# Altium PCB PCB1.PcbDoc
Units mil, origin at the board's own origin, x right, y up, seen from the top; angles counter-clockwise.
Board outline 7884.05 x 541.63 mil, 2 copper layers (Top Layer, Bottom Layer); 13 components, 6 nets, 53 pads, 11 vias.
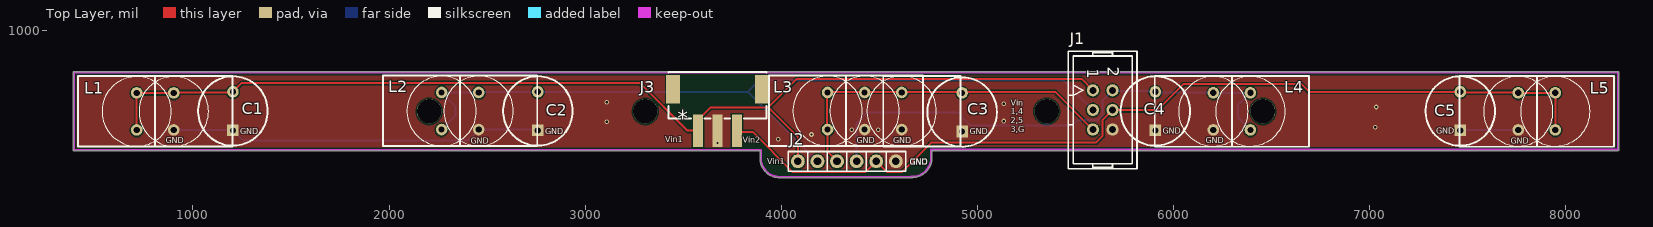
[diagram p0: Top Layer view]
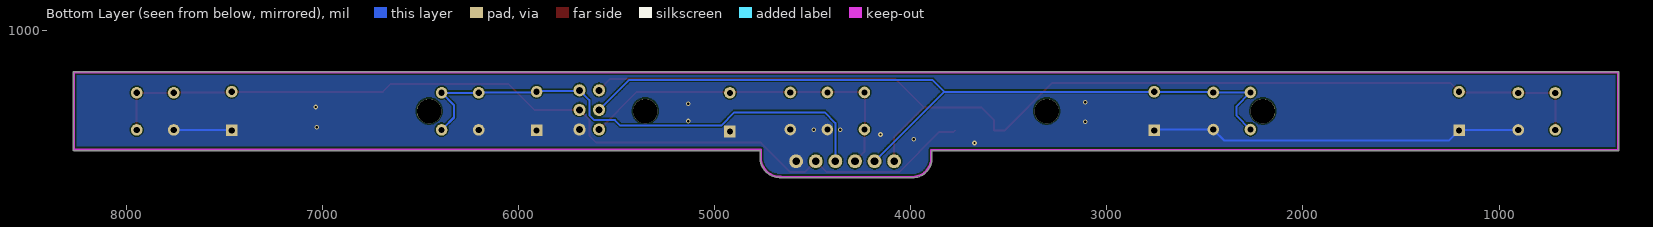
[diagram p1: Bottom Layer view, seen from below]
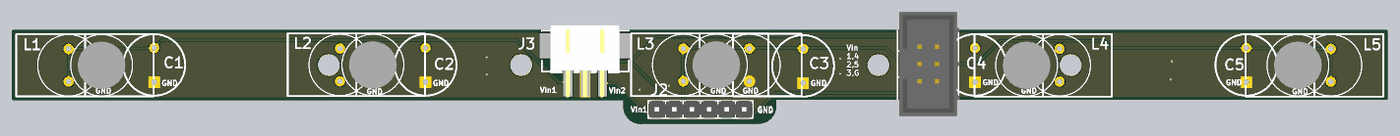
[diagram p2: 3D render of the assembled board from above, using the file's embedded part models]

## Layer stack, top to bottom
Top Solder: solder mask 0.4, Solder Resist, Dk 3.5
Top Layer: signal copper 1.4
Dielectric 1: dielectric 12.6, FR-4, Dk 4.8
Bottom Layer: signal copper 1.4
Bottom Solder: solder mask 0.4, Solder Resist, Dk 3.5

## Board outline
3892.62,358.46 ccw(c3992.48,350.84) 3998.96,250.91 ccw(c3998.64,255.91) 3999.3,250.94 ccw(c4000,255.91) 4000,250.89 4666.42,250.89 ccw(c4666.42,255.91) 4670.04,252.43 ccw(c4668.94,352.58) 4769.08,352.58 ccw(c4668.94,352.58) 4768.79,360.19 4768.79,389.99 8267.72,389.99 ccw(c8267.72,395) 8272.73,395 8272.73,787.4 ccw(c8267.72,787.4) 8267.72,792.42 393.7,792.42 ccw(c393.7,787.4) 388.69,787.4 388.69,393.7 ccw(c393.7,393.7) 393.7,388.69 3892.62,388.69

## Design rules (kind name [scope] priority, off if disabled: settings)
Clearance [All] p1: gap=6 ignorepadtopadclearanceinfootprint=TRUE except(0: Arc-Hole Track-Hole SMDPad-Hole THPad-Hole Via-Hole Fill-Hole Poly-Hole Region-Hole Text-Hole)
PolygonConnect [All] p1: connectstyle=Direct reliefconductorwidth=10 reliefentries=4 polygonreliefangle="90 Angle" airgapwidth=10
RoutingVias [All] p1: holewidth=28 width=50 viastyle="Through Hole" minholewidth=28 minwidth=50 maxholewidth=28 maxwidth=50
SolderMaskExpansion [All] p1: expansion=4
Width [All] p1: maxlimit=10 minlimit=10 preferedwidth=10
30 further rules are at their usual default settings.

## Components (designator, comment, footprint, x,y, rotation, side; value= is the part's Value field where it differs from the comment)
C1 "电容" 5mm 1200.79,590.55 r90 top value=22pF
C2 "电容" 5mm 2755.91,590.55 r90 top value=22pF
C3 "电容" 5mm 4920,585 r90 top value=22pF
C4 "电容" 5mm 5905.51,590.55 r90 top value=22pF
C5 "电容" 5mm 7460.63,590.55 r90 top value=22pF
J1 "PIN-6" 2.54简易牛角座6P 5590,696.97 r270 top
J2 "SIP-6" 2.54排针1X6 4385,335 r0 top
J3 "SIP-3" XH2.54-3SMD 3675,596.97 r0 top
L1 "直插电感" L8*10_4p_L 807.09,588.58 r90 top
L2 "直插电感" L8*10_4p_L 2362.2,590.55 r90 top
L3 "直插电感" L8*10_4p_C 4330.71,590.55 r90 top
L4 "直插电感" L8*10_4p_R 6299.21,590.55 r270 top
L5 "直插电感" L8*10_4p_R 7854.33,590.55 r270 top

## Footprints (in the part's own frame and the unit in brackets; to place one, negate y for a bottom-side part, rotate by r counter-clockwise, add the part's x,y. Pads: shape width x height; smd on the part's side, far side on the other; paste and mask are expansions set on the pad)
2.54排针1X6 [mm]
  round 1.8 hole 1: 1(-7.62,0) 2(-5.08,0) 3(-2.54,0) 4(0,0) 5(2.54,0) 6(5.08,0)
  silkscreen extent -8.89,-1.27 6.35,1.27, body extent -8.89,-1.27 6.35,1.27, height 2.5
2.54简易牛角座6P [mil]
  round 62 hole 35: 1(0,0) 2(0,100) 3(100,0) 4(100,100) 5(200,0) 6(200,100)
  silkscreen extent -200,-125 400,225, body extent -200,-117 400,231, height 359
5mm [mm] "插件"
  rect 1.5x1.5 hole 0.8: 1(-2.489,-0.076)
  round 1.5 hole 0.8: 2(2.515,-0.076)
  silkscreen extent -4.47,-4.58 4.52,4.42
L8*10_4p_C [mm]
  round 1.5 hole 0.8: 1(-2.377,-2.413) 1(-2.377,-7.213) 2(-2.377,2.387) 2(2.423,-2.413) 2(2.423,2.387) 2(2.423,-7.213)
  silkscreen extent -4.56,-14.83 4.61,10, body extent -3.48,-5.91 3.52,1.09, height 10.92
L8*10_4p_L [mm]
  round 1.5 hole 0.8: 1(-2.377,-2.413) 2(-2.377,2.387) 2(2.423,-2.413) 2(2.423,2.387)
  silkscreen extent -4.54,-10 4.61,10, body extent -3.48,-5.91 3.52,1.09, height 10.92
L8*10_4p_R [mm]
  round 1.5 hole 0.8: 1(2.423,-2.413) 2(-2.377,2.387) 2(-2.377,-2.413) 2(2.423,2.387)
  silkscreen extent -4.54,-10 4.61,10, body extent -3.48,-5.91 3.52,1.09, height 10.92
XH2.54-3SMD [mm] "CONN-SMD_3P-P2.54_XH2.54-3AB"
  rect 1.3x4.2 smd: 1(-2.54,-2.675) 2(0,-2.675) 3(2.54,-2.675)
  rect 1.801x3.7 smd: 4(-5.741,2.675) 5(5.741,2.675)
  silkscreen extent -6.35,-1.13 6.35,4.93, body extent -5.05,-4.87 4.95,5.63, height 5.85

## Part data
C1 C2 C3 C4 C5: "Capacitor", LatestRevisionDate=17-Jul-2002, LatestRevisionNote="Re-released for DXP Platform.", PackageDescription="Radial Cap, Thru-Hole; 2 Leads; 0.3 in Pin Spacing", PackageReference=RAD-0.3, Published=8-Jun-2000, Publisher="Altium Limited"

## Free pads (board coordinates)
  round 125.98 hole 125.98: 0(2204.72,590.55) 0(3307.09,590.55) 0(5354.33,590.55) 0(6456.69,590.55)

## Via types
v1: diameter 24, hole 12, Top Layer to Bottom Layer, tented both sides, 11 vias

## Nets (pads, with @x,y where several pads share a name; then routed paths per layer and width w, separated by ;. In a path a pad name is that pad's centre, name@x,y a point inside that pad or via, vN(x,y) a via of type N, cw(c..) or ccw(c..) an arc to the next point about the centre after c; other vN are vias at no path point)
GND: C1.1 C2.1 C3.1 C4.1 C5.1 J1.6 J2.6 J3.2 L1.1 L2.1 L3.1 L4.1 L5.1 | length 2208
  Bottom Layer w10: L1.1 1201.34,495 C1.1 1256.34,440 2400.24,440 L2.1 2754.49,496.97 C2.1 ; L3.1@4614.69,493.37 4614.69,496.97 L3.1@4619.1,492.55 ; C5.1@7466.24,495.16 L5.1
  other v1: 3675,428 3985,448 4155,472 4360,496 4495,496 7030,508 3110,536 5135,540 7035,612 5135,628 3110,636
Vin1: C1.2 J1.1 J2.1 J3.1 L1.2 | length 5689.3
  Top Layer w10: L1.2@713.11,495 713.11,683.98 902.09,683.98 904.87,686.76 1201,686.76 C1.2 1249.24,735 3278.99,735 3522.34,491.65 J3.1 3575,545 3640,610 3935,610 ; J2.1 4085,460 3935,610 ; J1.1 5531.97,755 4080,755 3935,610
Vin2: C2.2 J1.3 J2.2 L2.2 | length 4161.5
  Bottom Layer w10: L2.2@2268.23,496.97 2340,568.74 2340,614.17 2268.23,685.94 2457.2,685.94 2459.01,687.75 2757.1,687.75 C2.2 3830.45,689.55 ; J2.2 3830.45,689.55 ; J1.3 5436.97,750 3890.9,750 3830.45,689.55
Vin3: C3.2 J1.5 J2.3 L3.2 | length 1810.6
  Top Layer w10: L3.2@4233.72,496.97 4233.72,689.55 5397.42,689.55 J1.5 ; L3.2@4236.73,496.97 4236.73,383.27 J2.3
Vin4: C4.2 J1.2 J2.4 L4.2 | length 2636.2
  Top Layer w10: J1.2 J1.2@5693.71,693.26 ; C4.2@5904.8,693.26 C4.2
  Bottom Layer w10: J2.4 4385,530 4440,585 4899.61,585 4968.05,516.56 5481.56,516.56 5510,545 5615,545 5640,570 5640,646.97 J1.2 5693.71,693.26 5904.8,693.26 C4.2 5911.22,686.84 6201.5,686.84 6204.21,684.13 6393.19,684.13 6330,620.94 6330,558.35 6384.84,503.5 6384.84,495.16 L4.2@6393.19,495.16
Vin5: C5.2 J1.4 J2.5 J3.3 L5.2 | length 4754.9
  Top Layer w10: J3.3 3781.64,485 3855,485 4060,280 4430,280 J2.5 4485,325 4495,325 4540,280 4615,280 4765,430 5605,430 5640,465 5640,546.97 J1.4 5920,596.97 6053.03,730 ; 6053.11,730.08 6053.03,730 ; L5.2@7948.31,495.16 7948.31,684.13 7759.33,684.13 7756.62,686.84 7466.34,686.84 C5.2 6692.48,689.55 6652.03,730 6053.03,730
pads on no net: J3.4 J3.5

## Polygon pours and split planes (outlines as drawn)
no net on Drill Drawing (none, remove dead copper): 3892.62,358.46 ccw(c3992.48,350.84) 3998.96,250.91 ccw(c3998.64,255.91) 3999.3,250.94 ccw(c4000,255.91) 4000,250.89 4663.06,250.89 ccw(c4666.43,254.61) 4666.43,249.59 ccw(c4666.43,350.61) 4767.39,347.13 ccw(c4763.78,350.61) 4768.79,350.61 4768.79,389.99 8267.72,389.99 ccw(c8267.72,395) 8272.73,395 8272.73,787.4 ccw(c8267.72,787.4) 8267.72,792.42 393.7,792.42 ccw(c393.7,787.4) 388.69,787.4 388.69,393.7 ccw(c393.7,393.7) 393.7,388.69 3892.62,388.69
no net on Drill Drawing (solid, remove dead copper): 0,1560
no net on Drill Drawing (solid, remove dead copper): 4900,990
GND on Top Layer (hatched Horizontal grid 4 track 5, remove dead copper, pour order 0): 3892.62,358.46 ccw(c3992.48,350.84) 3998.96,250.91 ccw(c3998.64,255.91) 3999.3,250.94 ccw(c4000,255.91) 4000,250.89 4663.06,250.89 ccw(c4666.43,254.61) 4666.43,249.59 ccw(c4666.43,350.61) 4767.39,347.13 ccw(c4763.78,350.61) 4768.79,350.61 4768.79,389.99 8267.72,389.99 ccw(c8267.72,395) 8272.73,395 8272.73,787.4 ccw(c8267.72,787.4) 8267.72,792.42 393.7,792.42 ccw(c393.7,787.4) 388.69,787.4 388.69,393.7 ccw(c393.7,393.7) 393.7,388.69 3892.62,388.69
GND on Bottom Layer (hatched Horizontal grid 4 track 5, remove dead copper, pour order 2): 3892.62,358.46 ccw(c3992.48,350.84) 3998.96,250.91 ccw(c3998.64,255.91) 3999.3,250.94 ccw(c4000,255.91) 4000,250.89 4663.06,250.89 ccw(c4666.43,254.61) 4666.43,249.59 ccw(c4666.43,350.61) 4767.39,347.13 ccw(c4763.78,350.61) 4768.79,350.61 4768.79,389.99 8267.72,389.99 ccw(c8267.72,395) 8272.73,395 8272.73,787.4 ccw(c8267.72,787.4) 8267.72,792.42 393.7,792.42 ccw(c393.7,787.4) 388.69,787.4 388.69,393.7 ccw(c393.7,393.7) 393.7,388.69 3892.62,388.69

## Keep-outs
Keep-Out Layer:
  lines w10: 3895,393.7 393.7,393.7 393.7,787.4 8267.72,787.4 8267.72,395 4763.78,395 ; 3897.64,393.7 3897.64,358.27 ccw(c3992.48,350.84) 3998.64,255.91 ; 4000,255.91 4666.42,255.91 ; 4662.78,257.64 ccw(c4668.94,352.58) 4763.78,360 ; 4763.78,350.61 4763.78,393.7

## Silkscreen, mask and mechanical layers (free items; w line width, h text height)
Top Overlay:
  text "Vin / 1,4 / 2,5 / 3,G" at 5170,484 h30
  text "GND" at 5946,476 h30
  text "GND" at 7341,476 h30
  text "GND" at 1241,472 h30
  text "GND" at 2796,472 h30
  text "GND" at 4961,472 h30
  text "Vin1" at 3410,432 h30
  text "Vin2" at 3805,430 h30
  text "GND" at 861,428 h30
  text "GND" at 4386,428 h30
  text "GND" at 4571,428 h30
  text "GND" at 6166,428 h30
  text "GND" at 2416,424 h30
  text "GND" at 7721,424 h30
  text "Vin1" at 3929.91,320 h30
  text "GND" at 4655.91,320 h30
  text "GND" at 4655.91,316 h30

## Text inside footprints (layer, text, board x,y; h text height)
J1: Top Overlay "1" at 5561,806.97 h60 r270; Top Overlay "2" at 5665,817.97 h60 r270
J3: Top Overlay "*" at 3527,627.3 h80 r180